# Altium PCB PIC_Prototyping_PCB.PcbDoc
Units mil, origin at the board's own origin, x right, y up, seen from the top; angles counter-clockwise.
Board outline 1000 x 2000 mil, 2 copper layers (Top Layer, Bottom Layer); 13 components, 20 nets, 58 pads, 4 vias.
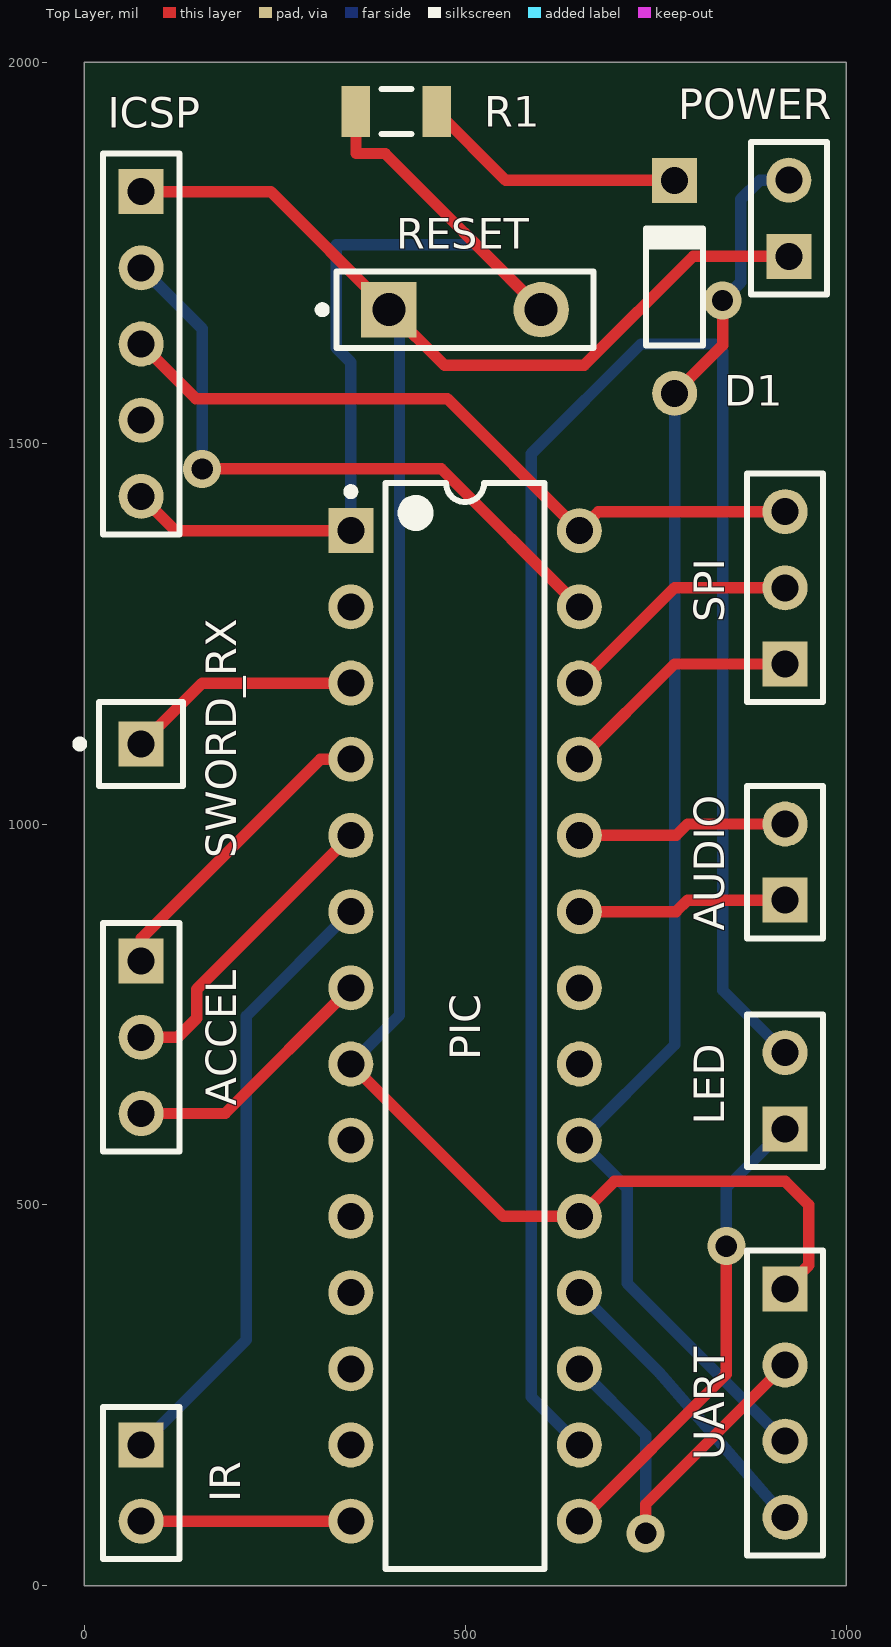
[diagram p0: Top Layer view]
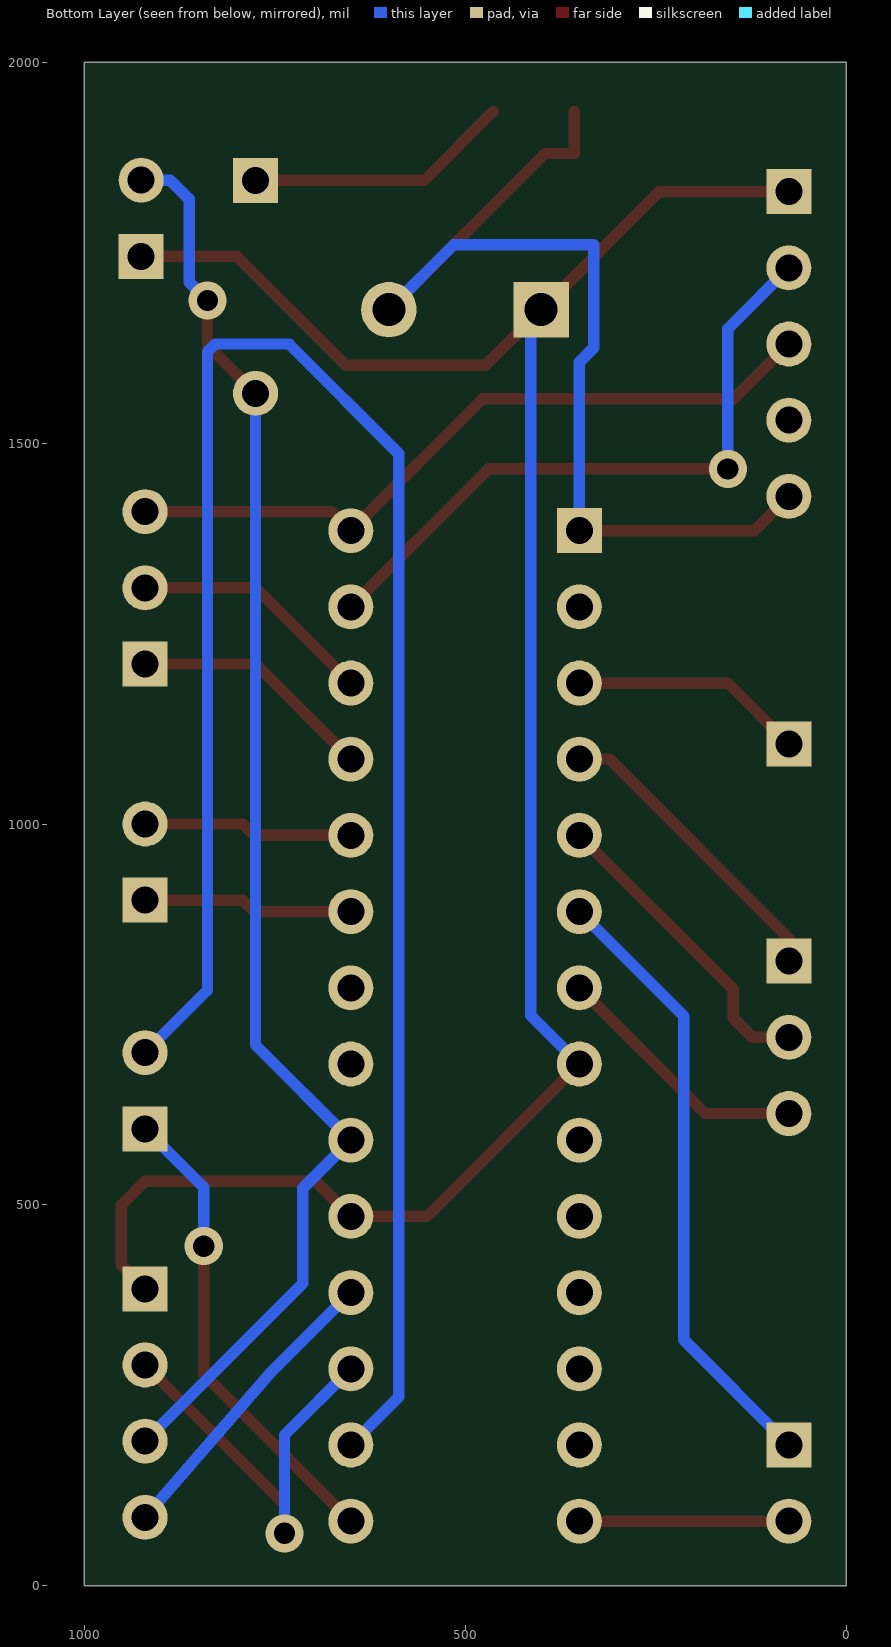
[diagram p1: Bottom Layer view, seen from below]

## Layer stack, top to bottom
Top Solder: solder mask 0.4, Solder Resist, Dk 3.5
Top Layer: signal copper 1.4
Dielectric1: dielectric 12.6, FR-4, Dk 4.8
Bottom Layer: signal copper 1.4
Bottom Solder: solder mask 0.4, Solder Resist, Dk 3.5

## Board outline
0,0 0,2000 1000,2000 1000,0

## Design rules (kind name [scope] priority, off if disabled: settings)
Clearance [All] p1: gap=25
FabricationTestPointUsage TestPointUsage [All] p1: valid=0 allowmultiple=FALSE
FabricationTestpoint Testpoint [All] p1: side=3 testpointundercomponent=TRUE minsize=40 maxsize=100 preferedsize=60 minholesize=0 maxholesize=40 preferedholesize=32 testpointgrid=1 allowsidetop=TRUE allowsidebottom=TRUE usegrid=TRUE gridtolerance=0.01
PolygonConnect [All] p1: connectstyle=Relief reliefconductorwidth=10 reliefentries=4 polygonreliefangle="90 Angle" airgapwidth=10
RoomDefinition PIC_Prototyping_Schematic [InComponentClass('PIC_Prototyping_Schematic')] p1: confinementstyle=ConfineIn formatcopy=TRUE lockcomponents=FALSE outline 1545,60 6370,60 6370,1610 1545,1610
RoutingVias [All] p1: holewidth=28 width=50 viastyle="Through Hole" minholewidth=28 minwidth=50 maxholewidth=28 maxwidth=50
SilkToSolderMaskClearance SilkscreenOverComponentPads [IsPad] p1: minsilkscreentomaskgap=10 clearancetoexposedcopper=TRUE
SolderMaskExpansion [All] p1: expansion=4
Width [All] p1: maxlimit=15 minlimit=15 preferedwidth=15
27 further rules are at their usual default settings.

## Components (designator, comment, footprint, x,y, rotation, side; value= is the part's Value field where it differs from the comment)
ACCEL "Header 3" HDR1X3 75,820 r270 top
AUDIO "Header 2" HDR1X2 920,900 r90 top
D1 "1N4148" DO-35 775,1705 r90 top
ICSP "Header 5" HDR1X5 75,1830 r270 top
IR "Header 2" HDR1X2 75,185 r270 top
LED "Header 2" HDR1X2 920,600 r90 top
PIC "PIC16F72-I/SP" SPDIP300-SP28 500,735 r0 top
POWER "Header 2" HDR1X2 925,1745 r90 top
R1 "Jumper 1206(3216)" RESC1206(3216)_L 410,1935 r0 top
RESET "SW-SPST" SPST-2 500,1675 r0 top
SPI "Header 3" HDR1X3 920,1210 r90 top
SWORD_RX "Socket" PIN1 75,1105 r90 top
UART "Header 4" HDR1X4 920,390 r270 top

## Footprints (in the part's own frame and the unit in brackets; to place one, negate y for a bottom-side part, rotate by r counter-clockwise, add the part's x,y. Pads: shape width x height; smd on the part's side, far side on the other; paste and mask are expansions set on the pad)
DO-35 [mm] "Diode, Axial; Body 3.8 x 1.9 mm (LxDia. max), Lead Dia. 0.53 mm (max)"
  round 1.5 hole 0.9: 1(-3.55,0)
  rect 1.5x1.5 hole 0.9: 2(3.55,0)
  silkscreen extent -1.95,-0.95 2.05,0.95
HDR1X2 [mm] "Connector; Header; 2 Position"
  rect 1.5x1.5 hole 0.9: 1(0,0)
  round 1.5 hole 0.9: 2(2.54,0)
  silkscreen extent -1.27,-1.27 3.81,1.27
HDR1X3 [mm] "Connector; Header; 3 Position"
  rect 1.5x1.5 hole 0.9: 1(0,0)
  round 1.5 hole 0.9: 2(2.54,0) 3(5.08,0)
  silkscreen extent -1.27,-1.27 6.35,1.27
HDR1X4 [mm] "Connector; Header; 4 Position"
  rect 1.5x1.5 hole 0.9: 1(0,0)
  round 1.5 hole 0.9: 2(2.54,0) 3(5.08,0) 4(7.62,0)
  silkscreen extent -1.27,-1.27 8.89,1.27
HDR1X5 [mm] "Connector; Header; 5 Position"
  rect 1.5x1.5 hole 0.9: 1(0,0)
  round 1.5 hole 0.9: 2(2.54,0) 3(5.08,0) 4(7.62,0) 5(10.16,0)
  silkscreen extent -1.27,-1.27 11.43,1.27
PIN1 [mm] "Connector; Plug"
  rect 1.5x1.5 hole 0.9: 1(0,0)
  silkscreen extent -1.4,-1.4 1.4,2.17
RESC1206(3216)_L [mm] "Chip Resistor, Body 3.2x1.6mm, IPC High Density"
  rect 0.95x1.7 smd: 1(-1.35,0) 2(1.35,0)
  silkscreen extent -0.5,-0.75 0.5,0.75, body extent -1.67,-0.87 1.67,0.87, height 0.75
SPDIP300-SP28 [mm] "DIP, 28-Leads, Row Spacing 7.62mm, Pitch 2.54mm, Body 34.9x6.8mm"
  rect 1.5x1.5 hole 0.9: 1(-3.81,16.51)
  round 1.5 hole 0.9: 2(-3.81,13.97) 3(-3.81,11.43) 4(-3.81,8.89) 5(-3.81,6.35) 6(-3.81,3.81) 7(-3.81,1.27) 8(-3.81,-1.27) 9(-3.81,-3.81) 10(-3.81,-6.35) 11(-3.81,-8.89) 12(-3.81,-11.43) 13(-3.81,-13.97) 14(-3.81,-16.51) 15(3.81,-16.51) 16(3.81,-13.97) 17(3.81,-11.43) 18(3.81,-8.89) 19(3.81,-6.35) 20(3.81,-3.81) 21(3.81,-1.27) 22(3.81,1.27) 23(3.81,3.81) 24(3.81,6.35) 25(3.81,8.89) 26(3.81,11.43) 27(3.81,13.97) 28(3.81,16.51)
  silkscreen extent -3.93,-18.1 2.65,18.1, body extent -3.55,-18.1 3.55,18.1, height 5.08
SPST-2 [mm] "Switch; 2 Leads"
  rect 1.85x1.85 hole 1.1: 1(-2.54,0)
  round 1.85 hole 1.1: 2(2.54,0)
  silkscreen extent -4.89,-1.27 4.28,1.27

## Part data
ACCEL SPI: "Header, 3-Pin"
AUDIO IR LED POWER: "Header, 2-Pin"
D1: "High Conductance Fast Diode"
ICSP: "Header, 5-Pin"
PIC: "8-Bit CMOS FLASH Microcontroller with A/D Converter, 2K (x14-Bit words) FLASH, 128 Bytes RAM, 28-Pin PDIP 300mil, Standard VDD Range, Industrial Temperature"
R1: library part CMP-1014-00001-1, "Jumper 1206 (3216 Metric)"
RESET: "Single-Pole, Single-Throw Switch"
UART: "Header, 4-Pin"

## Via types
v1: diameter 50, hole 28, Top Layer to Bottom Layer, 4 vias

## Nets (pads, with @x,y where several pads share a name; then routed paths per layer and width w, separated by ;. In a path a pad name is that pad's centre, name@x,y a point inside that pad or via, vN(x,y) a via of type N, cw(c..) or ccw(c..) an arc to the next point about the centre after c; other vN are vias at no path point)
NetACCEL_1: ACCEL.1 PIC.4 | length 402.2
  Top Layer w15: ACCEL.1 75,849.79 310.21,1085 PIC.4
NetACCEL_2: ACCEL.2 PIC.5 | length 407
  Top Layer w15: ACCEL.2 123,720 148,745 148,783 PIC.5
NetACCEL_3: ACCEL.3 PIC.7 | length 343.3
  Top Layer w15: ACCEL.3 185,620 PIC.7
NetAUDIO_1: AUDIO.1 PIC.23 | length 276.2
  Top Layer w15: PIC.23 777,885 792,900 AUDIO.1
NetAUDIO_2: AUDIO.2 PIC.24 | length 276.2
  Top Layer w15: PIC.24 777,985 792,1000 AUDIO.2
NetD1_1: D1.1 PIC.20 POWER.2 UART.3 | length 1903
  Top Layer w15: D1.1 838,1628.24 v1(838,1687)
  Bottom Layer w15: D1.1 775,710 PIC.20 713,522 713,397 UART.3 ; v1(838,1687) 862,1711 862,1820 887,1845 POWER.2
NetD1_2: D1.2 R1.2 | length 349.2
  Top Layer w15: R1.2 553.39,1844.76 D1.2
NetICSP_1: ICSP.1 PIC.8 PIC.19 POWER.1 RESET.1 UART.1 | length 2864.6
  Top Layer w15: ICSP.1 245,1830 RESET.1 473,1602 656.25,1602 799.25,1745 POWER.1 ; PIC.8 550,485 PIC.19 696,531 920,531 951,500 951,421 UART.1
  Bottom Layer w15: PIC.8 414,749 414,1661 RESET.1
NetICSP_2: ICSP.2 PIC.27 | length 867.1
  Top Layer w15: v1(155,1466) 469,1466 PIC.27
  Bottom Layer w15: ICSP.2 155,1650 v1(155,1466)
NetICSP_3: ICSP.3 PIC.28 SPI.3 | length 956.8
  Top Layer w15: ICSP.3 146.6,1558.4 476.6,1558.4 PIC.28 675,1410 SPI.3
NetICSP_5: ICSP.5 PIC.1 R1.1 RESET.2 | length 1363.8
  Top Layer w15: ICSP.5 120,1385 PIC.1 ; R1.1 356.85,1880 395,1880 RESET.2
  Bottom Layer w15: PIC.1 350,1606 331,1625 331,1760 515,1760 RESET.2
NetIR_1: IR.1 PIC.6 | length 813.9
  Bottom Layer w15: IR.1 213,323 213,748 PIC.6
NetIR_2: IR.2 PIC.14 | length 275
  Top Layer w15: IR.2 PIC.14
NetLED_1: LED.1 PIC.15 | length 626.8
  Top Layer w15: PIC.15 843,278 v1(843,446)
  Bottom Layer w15: v1(843,446) 843,523 LED.1
NetLED_2: LED.2 PIC.16 | length 2595.8
  Bottom Layer w15: PIC.16 587,248 587,1486 731,1630 828,1630 838,1620 838,782 LED.2
NetPIC_3: PIC.3 SWORD_RX.1 | length 308.1
  Top Layer w15: SWORD_RX.1 155,1185 PIC.3
NetPIC_17: PIC.17 UART.2 | length 548.8
  Top Layer w15: v1(737,69) 737,107 UART.2
  Bottom Layer w15: PIC.17 737,198 v1(737,69)
NetPIC_18: PIC.18 UART.4 | length 400.1
  Bottom Layer w15: PIC.18 755,280 UART.4
NetPIC_25: PIC.25 SPI.1 | length 321.8
  Top Layer w15: PIC.25 775,1210 SPI.1
NetPIC_26: PIC.26 SPI.2 | length 321.8
  Top Layer w15: PIC.26 775,1310 SPI.2
pads on no net: ICSP.4 PIC.2 PIC.9 PIC.10 PIC.11 PIC.12 PIC.13 PIC.21 PIC.22

## Silkscreen, mask and mechanical layers (free items; w line width, h text height)
Mechanical 16:
  drawing of 1874 lines, arcs and shapes, not listed
  text "1" at -1153,5335 h70
  text "2" at 1707,5335 h70
  text "3" at 4587,5335 h70
  text "4" at 7457,5335 h70
  text "A" at -2505,4429 h70
  text "A" at 8795,4429 h70
  text "B" at -2505,2537 h70
  text "B" at 8795,2537 h70
  text "C" at -2505,627 h70
  text "C" at 8795,627 h70
  text "ENGINEER:" at 4270,-830 h45
  text "TITLE:" at 5770,-830 h45
  text "PCB DESIGNER:" at 4270,-1125 h45
  text "D" at -2505,-1263 h70
  text "D" at 8795,-1263 h70
  text "DATE:" at 4270,-1430 h45
  text "PART NO.:" at 5770,-1430 h45
  text "REV:" at 7870,-1430 h45
  text "Altium Limited" at 2970,-1530 h70
  text ".PRINT_DATE" at 4320,-1550 h70
  text "12a Rodborough Rd" at 2970,-1630 h70
  text "Frenchs Forest" at 2970,-1730 h70
  text "FILE NAME:" at 4270,-1730 h45
  text "DWG NO:" at 5770,-1730 h45
  text "SCALE:" at 7870,-1730 h45
  text "NSW 2086" at 2970,-1830 h70
  text ".PCB_FILE_NAME_NO_PATH" at 4320,-1850 h70
  text "1" at -1153,-2065 h70
  text "2" at 1707,-2065 h70
  text "3" at 4587,-2065 h70
  text "4" at 7457,-2065 h70